# EAGLE board Proiect_TSC_v42 (EAGLE 9.7.0)
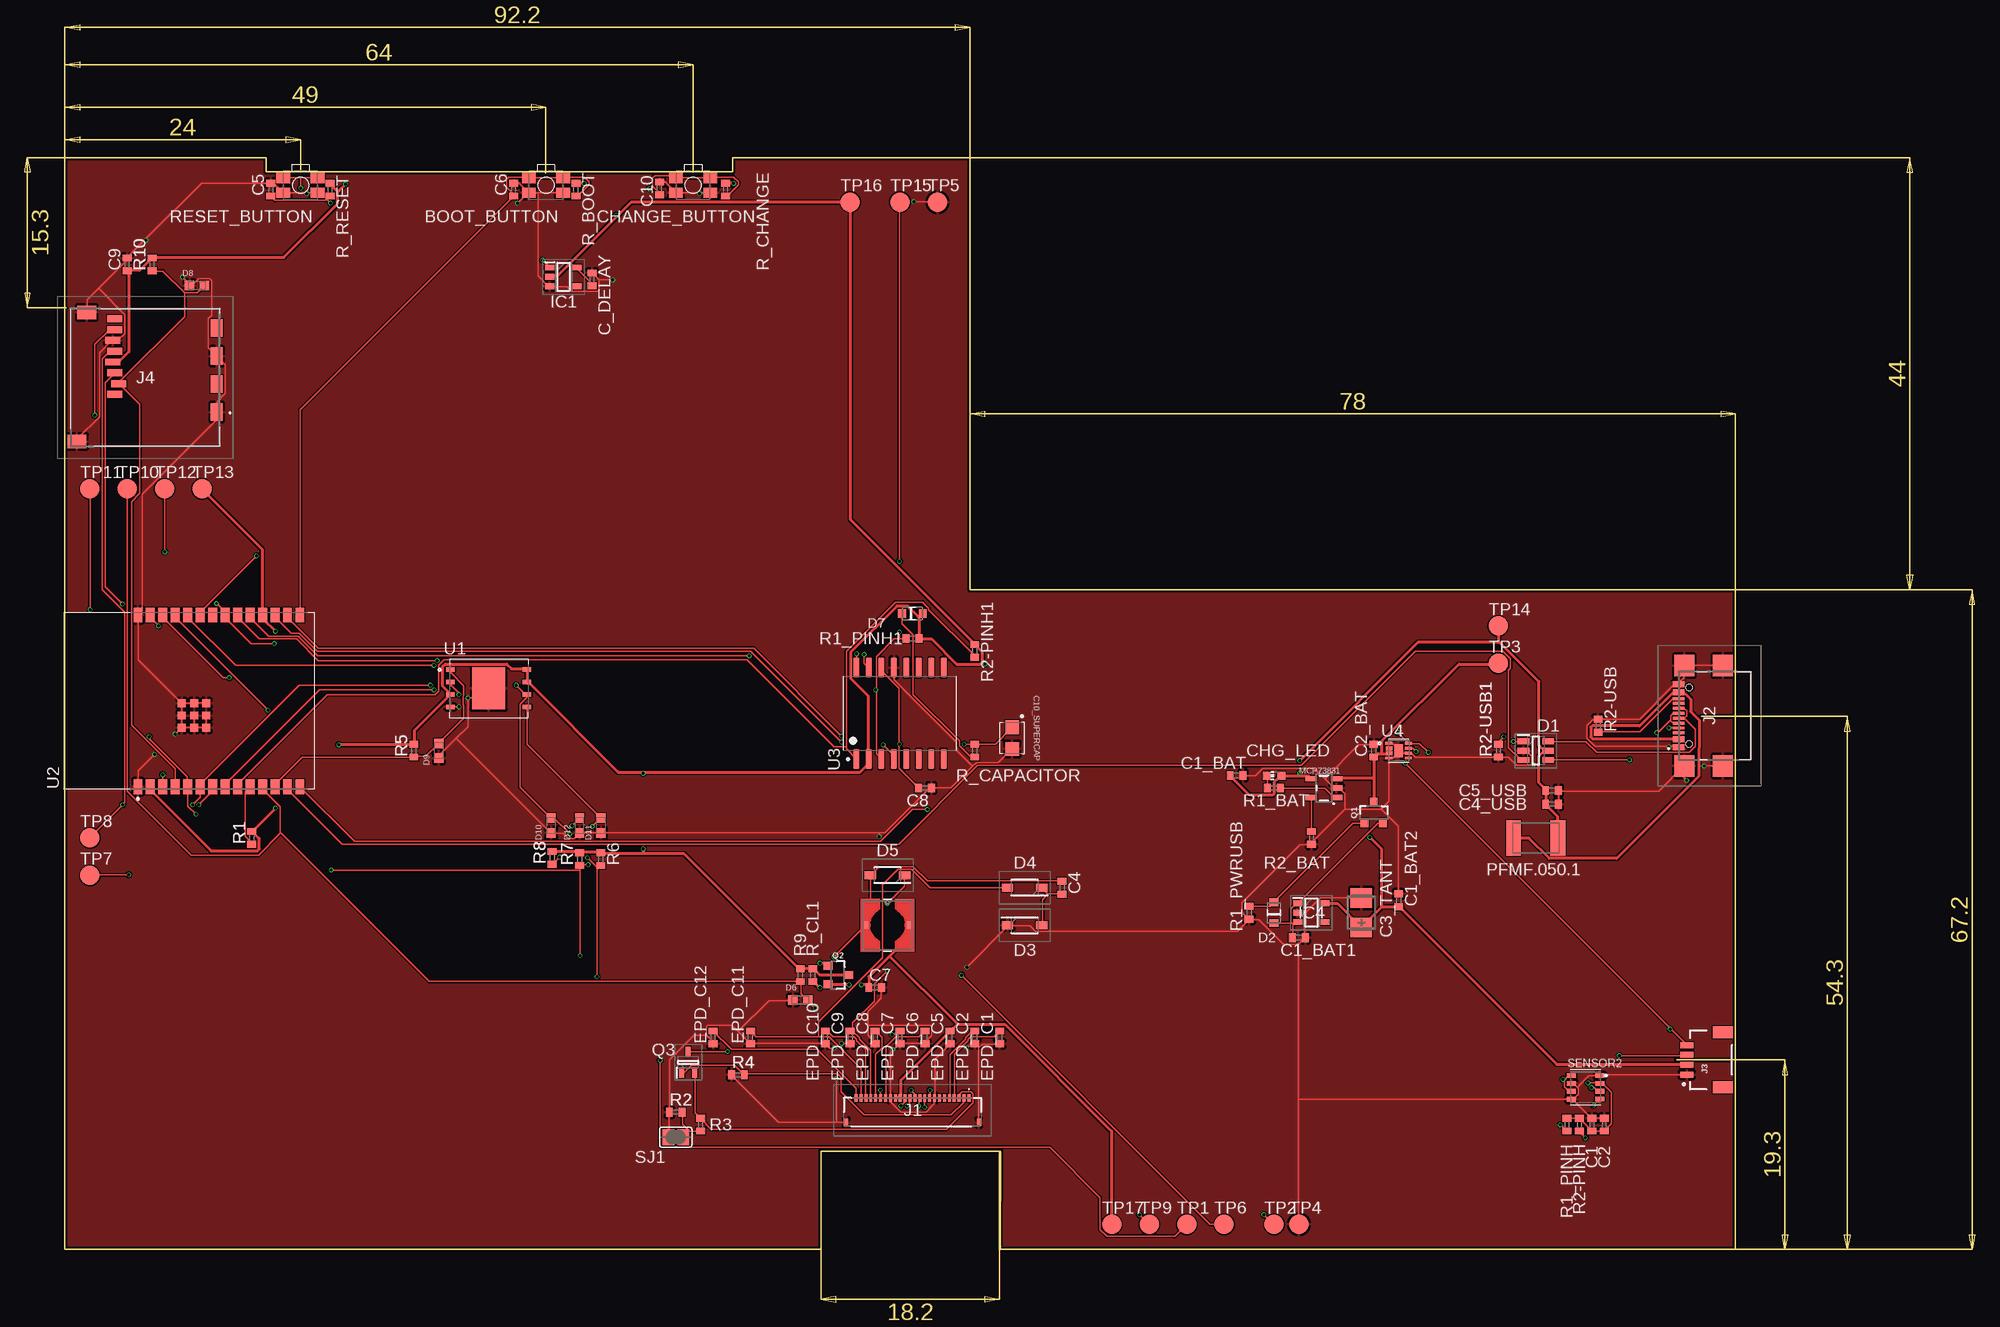
[diagram p0: board, top side]
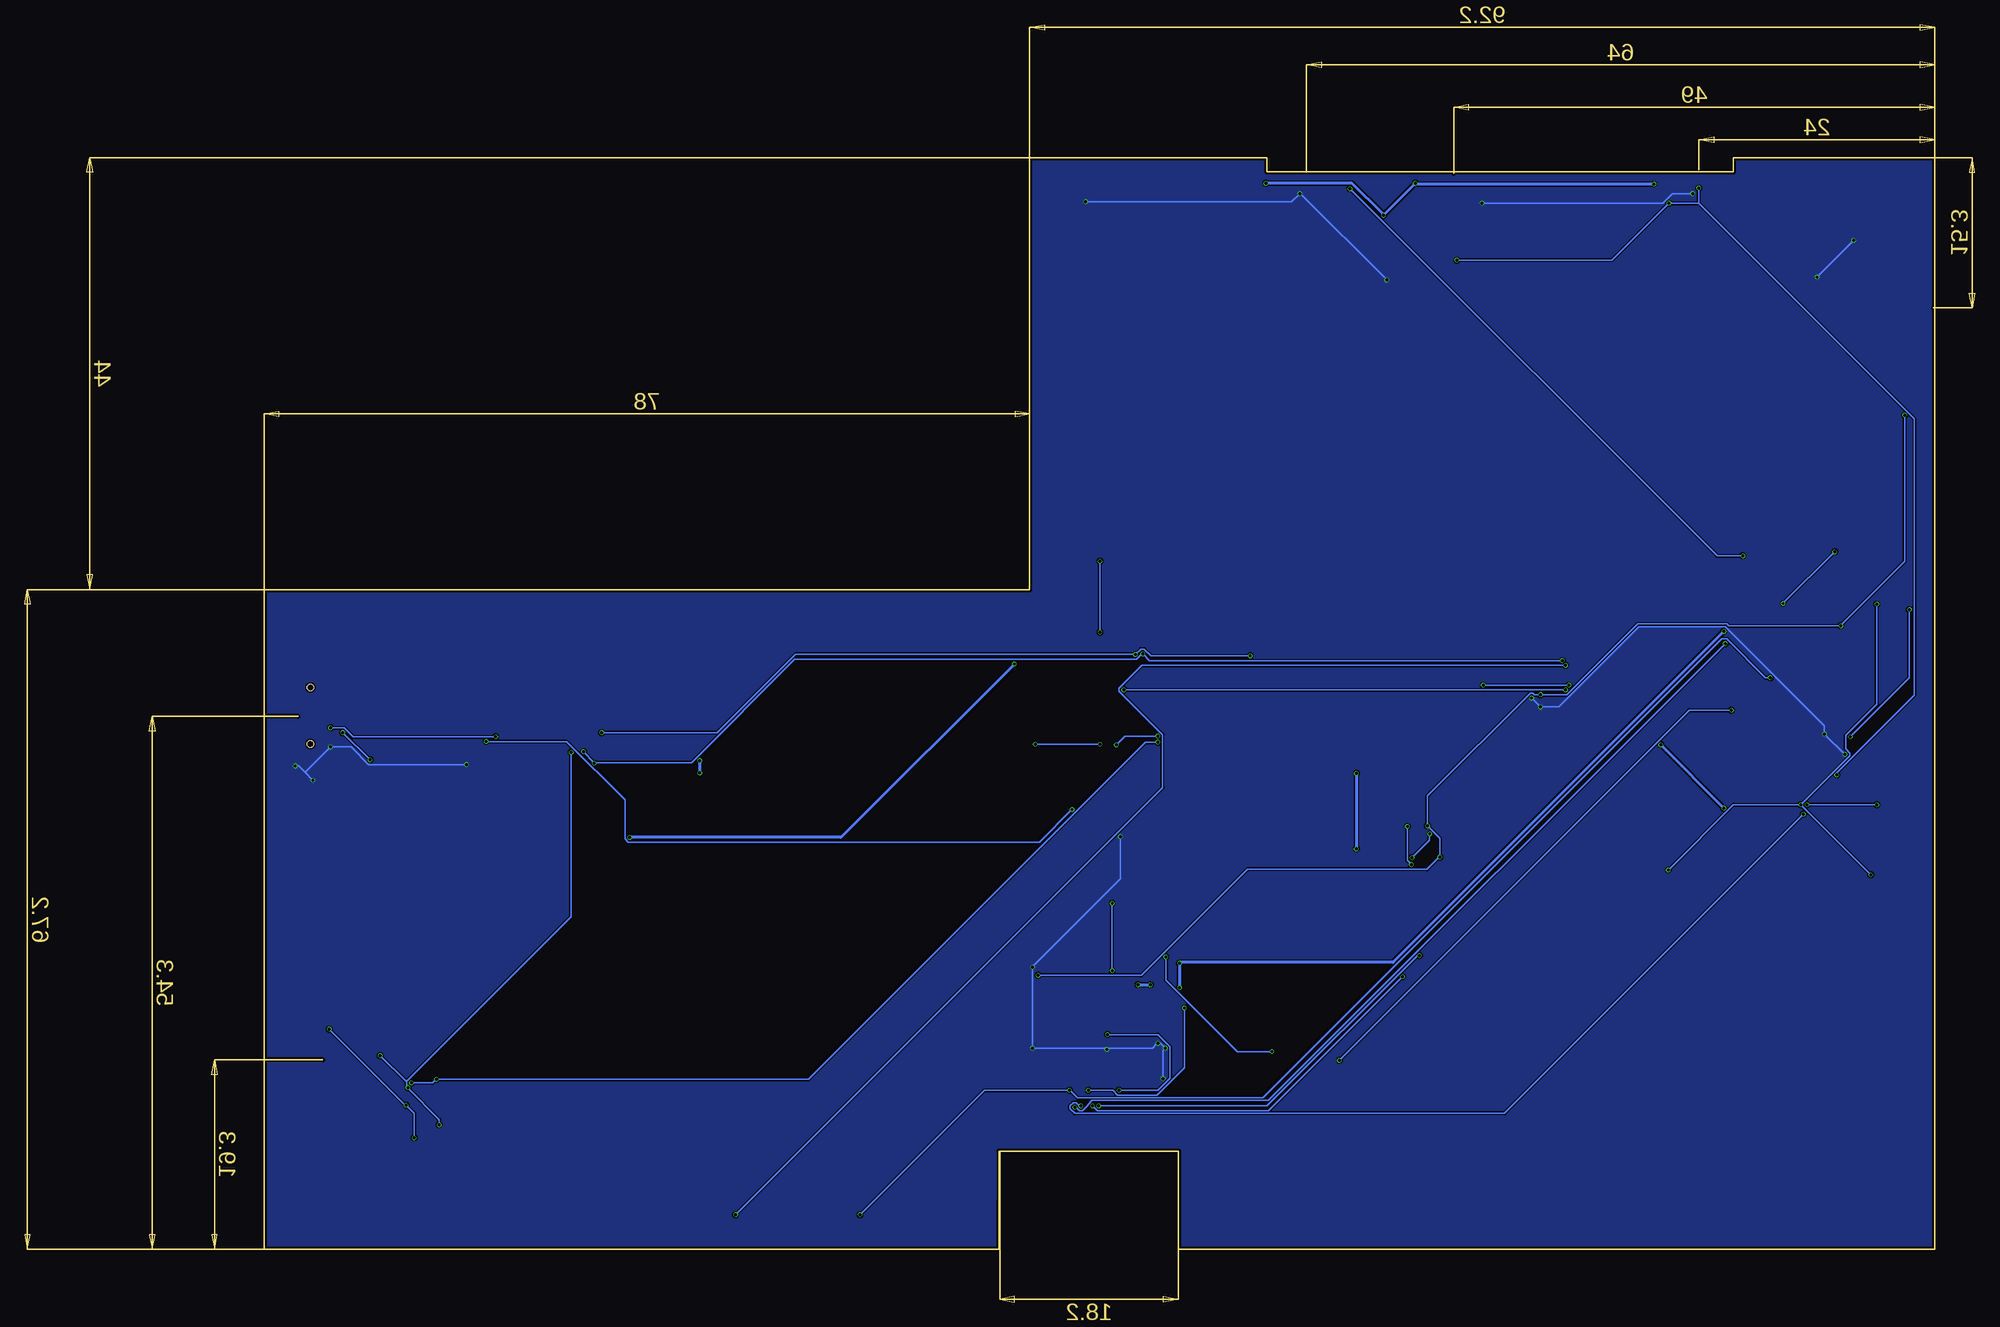
[diagram p1: board, bottom side, seen from below]

Size 170.2 x 111.2 mm. Coordinates in mm from the lower left corner, seen from the top.
Outline: 0,0 77.05,0 77.05,10 95.25,10 95.25,0 170.2,0 170.2,67.2 92.2,67.2 92.2,111.2 68.02,111.2 68.02,109.75 20.5,109.75 20.5,111.2 0,111.2 0,0
Copper layers (1*16): Top 0.035mm / dielectric 1.6mm / Bottom 0.035mm
Design rules "jlcpcb-2layers.dru": minimum track width 0.15mm, minimum drill 0.3mm, track to track 5mil, track to pad 5mil, pad to pad 5mil, via to via 5mil, smd to smd 5mil, copper to edge 0.2mm, drill to drill 6mil, minimum pad ring 10mil, minimum via ring 3mil, stop-mask expansion 4mil, vias tented up to drill 0mil, thermal gap 10mil
Net classes: 1 POWER: width 0.3 mm

## Footprints (pad centres in the part's own frame; a part is rotated, then mirrored left to right if it is on the bottom)
MYBUTTON = smd 1.4 x 1.05: 1 1.75,0.75; 2 -1.75,0.75; 3 -1.75,-0.75; 4 1.75,-0.75
EAGLE-LTSPICE_C0402 = smd 0.7 x 0.9: 1 -0.65,0; 2 0.65,0
ESP32_WROVER_EAGLE-LTSPICE_C0402 = smd 0.7 x 0.9: 1 -0.65,0; 2 0.65,0
RCL_CT3528 = smd 2 x 2.2: + -1.5,0; - 1.5,0
CAPCP3225X100N = smd 1.4 x 1.4: 1 -1.1,0; 2 1.1,0
ADAFRUIT_CHIP-LED0603 = smd 0.8 x 0.8: A 0,-0.75; C 0,0.75
SOT95P280X145-6N = smd 1.2 x 0.6: 1 -1.25,0.95; 2 -1.25,0; 3 -1.25,-0.95; 4 1.25,-0.95; 5 1.25,0; 6 1.25,0.95
ESP32_WROVER_AVX---SD0805S020S1R0_AVX_SD0805S020S1R0_0 = smd 0.8 x 0.9: 1 -1.05,0; 2 1.05,0
SOD3716X135N = smd 1.15 x 0.8: 1 -1.75,0; 2 1.75,0
DIOC1608X36N = smd 0.97 x 0.94: 1 -0.75,0; 2 0.75,0
SOT95P280X125-5N = smd 0.9 x 0.6: 1 -1.4,0.95; 2 -1.4,0; 3 -1.4,-0.95; 4 1.4,-0.95; 5 1.4,0.95
SOT95P280X120-5N = smd 0.9 x 0.6: 1 -1.4,0.95; 2 -1.4,0; 3 -1.4,-0.95; 4 1.4,-0.95; 5 1.4,0.95
FH34SRJ24S05SH99 = smd 0.3 x 0.8: 1 5.75,1.45; 2 5.25,1.45; 3 4.75,1.45; 4 4.25,1.45; 5 3.75,1.45; 6 3.25,1.45; 7 2.75,1.45; 8 2.25,1.45; 9 1.75,1.45; 10 1.25,1.45; 11 0.75,1.45; 12 0.25,1.45; 13 -0.25,1.45; 14 -0.75,1.45; 15 -1.25,1.45; 16 -1.75,1.45; 17 -2.25,1.45; 18 -2.75,1.45; 19 -3.25,1.45; 20 -3.75,1.45; 21 -4.25,1.45; 22 -4.75,1.45; 23 -5.25,1.45; 24 -5.75,1.45 | smd 0.4 x 0.8: MP1 6.75,-1.05; MP2 -6.75,-1.05
SAMACSYS_PARTS_USB4110GFA = smd 0.3 x 1.15: A1 -3.35,3.678; A4 -2.55,3.678; A5 -1.25,3.678; A6 -0.25,3.678; A7 0.25,3.678; A8 1.25,3.678; A9 2.55,3.678; A12 3.35,3.678; B1 3.05,3.678; B4 2.25,3.678; B5 1.75,3.678; B6 0.75,3.678; B7 -0.75,3.678; B8 -1.75,3.678; B9 -2.25,3.678; B12 -3.05,3.678 | smd 2.18 x 2: MP1 -5.11,-0.827; MP2 5.11,-0.827; MP3 -5.11,3.103; MP4 5.11,3.103 | hole 0.65: -2.89,2.603; 2.89,2.603
JST04_1MM_RA = smd 0.6 x 1.35: 1 -1.5,0; 2 -0.5,0; 3 0.5,0; 4 1.5,0 | smd 1.2 x 2: NC1 2.8,-3.675; NC2 -2.8,-3.675
112ATAARR03ATTEND = smd 1.8 x 1.2: G1 10.6,10.4; G2 4.9,10.4; S1 7.75,10.4; S2 2.05,10.4 | smd 1.4 x 1.9: G3 13.6,-3.85; G4 0.45,-2.85 | smd 0.7 x 1.5: P1 8.8,0; P2 7.7,0.4; P3 6.6,0; P4 5.5,-0.2; P5 4.4,0; P6 3.3,-0.2; P7 2.2,0; P8 1.1,0
IND_4828-WE-TPC_WRE = smd 0.635 x 0.762: 1 -2.286,0; 2 2.286,0
ESP32_WROVER_SPARKFUN-IC-POWER_SOT23-5 = smd 0.55 x 1.2: 1 -0.95,-1.3; 2 0,-1.3; 3 0.95,-1.3; 4 0.95,1.3; 5 -0.95,1.3
ESP32C6_VARISTOR_CT/CN1812 = smd 1.5 x 3.6: 1 -2.25,0; 2 2.25,0
ESP32_WROVER_SPARKFUN-DISCRETESEMI_SOT23-3 = smd 0.8 x 0.9: 1 -0.95,-1; 2 0.95,-1; 3 0,1.1
SOT65P210X110-3N = smd 1.05 x 0.5: 1 -1.05,0.65; 2 -1.05,-0.65; 3 1.05,0
ESP32_WROVER_EAGLE-LTSPICE_R0402 = smd 0.7 x 0.9: 1 -0.65,0; 2 0.65,0
ESP32_WROVER_BME680_PSON80P300X300X100-8N = smd 1.016 x 0.5: 1 1.458,1.2; 2 1.458,0.4; 3 1.458,-0.4; 4 1.458,-1.2; 5 -1.458,-1.22; 6 -1.458,-0.4; 7 -1.458,0.4; 8 -1.458,1.2
SJ = smd 1.168 x 1.6: 1 -0.762,0; 2 0.762,0
TP20R = smd 2 x 2: TP 0,0
SON127P600X800X80-9N = smd 0.94 x 0.44: 1 -3.895,1.905; 2 -3.895,0.635; 3 -3.895,-0.635; 4 -3.895,-1.905; 5 3.895,-1.905; 6 3.895,-0.635; 7 3.895,0.635; 8 3.895,1.905 | smd 3.4 x 4.3: 9 0,0
XCVR_ESP32-C6-WROOM-1-N8 = smd 1.5 x 0.9: 1 -8.75,5.26; 2 -8.75,3.99; 3 -8.75,2.72; 4 -8.75,1.45; 5 -8.75,0.18; 6 -8.75,-1.09; 7 -8.75,-2.36; 8 -8.75,-3.63; 9 -8.75,-4.9; 10 -8.75,-6.17; 11 -8.75,-7.44; 12 -8.75,-8.71; 13 -8.75,-9.98; 14 -8.75,-11.25; 15 8.75,-11.25; 16 8.75,-9.98; 17 8.75,-8.71; 18 8.75,-7.44; 19 8.75,-6.17; 20 8.75,-4.9; 21 8.75,-3.63; 22 8.75,-2.36; 23 8.75,-1.09; 24 8.75,0.18; 25 8.75,1.45; 26 8.75,2.72; 27 8.75,3.99; 28 8.75,5.26 | smd 0.8 x 0.8: 29_1 -2.755,0.79; 29_2 -1.505,0.79; 29_3 -0.255,0.79; 29_4 -2.755,-0.46; 29_5 -1.505,-0.46; 29_6 -0.255,-0.46; 29_7 -2.755,-1.71; 29_8 -1.505,-1.71; 29_9 -0.255,-1.71
SOIC127P1032X265-16N = smd 2.05 x 0.59: 1 -4.655,4.445; 2 -4.655,3.175; 3 -4.655,1.905; 4 -4.655,0.635; 5 -4.655,-0.635; 6 -4.655,-1.905; 7 -4.655,-3.175; 8 -4.655,-4.445; 9 4.655,-4.445; 10 4.655,-3.175; 11 4.655,-1.905; 12 4.655,-0.635; 13 4.655,0.635; 14 4.655,1.905; 15 4.655,3.175; 16 4.655,4.445
SON50P200X200X80-9N = smd 0.76 x 0.27: 1 -0.985,0.75; 4 -0.985,-0.75; 5 0.985,-0.75; 6 0.985,-0.25; 7 0.985,0.25; 8 0.985,0.75 | smd 0.76 x 0.422: 2 -0.985,0.25; 3 -0.985,-0.25 | smd 0.9 x 1.3: 9 0,0

## Placement (x,y rotation side)
BOOT_BUTTON  BUTTON_CUSYOMV1  [MYBUTTON]  49.02,108.38 180 top
C1  100nF  [EAGLE-LTSPICE_C0402]  155.57,12.7 90 top
C1_BAT  4.7uF  [EAGLE-LTSPICE_C0402]  119.38,48.26 0 top
C1_BAT1  4.7uF  [ESP32_WROVER_EAGLE-LTSPICE_C0402]  125.73,31.75 0 top
C1_BAT2  4.7uF  [ESP32_WROVER_EAGLE-LTSPICE_C0402]  135.89,35.56 90 top
C2  100nF  [EAGLE-LTSPICE_C0402]  156.84,12.7 90 top
C2_BAT  4.7uF  [EAGLE-LTSPICE_C0402]  133.35,50.8 90 top
C3_TANT  100uF  [RCL_CT3528]  132.08,34.29 90 top
C4  4.7uF/25V  [EAGLE-LTSPICE_C0402]  101.6,36.83 90 top
C4_USB  100 nF  [ESP32_WROVER_EAGLE-LTSPICE_C0402]  151.51,45.34 0 top
C5  1uF  [EAGLE-LTSPICE_C0402]  20.98,107.95 90 top
C5_USB  4.5uF  [ESP32_WROVER_EAGLE-LTSPICE_C0402]  151.51,46.74 0 top
C6  100nF  [EAGLE-LTSPICE_C0402]  45.72,107.95 90 top
C7  10uF  [EAGLE-LTSPICE_C0402]  82.55,26.67 0 top
C8  100nF  [EAGLE-LTSPICE_C0402]  87.63,46.99 0 top
C9  100nF  [EAGLE-LTSPICE_C0402]  6.35,100.33 90 top
C10  100nF  [EAGLE-LTSPICE_C0402]  60.58,108.08 90 top
C10_SUPERCAP  CPH3225A  [CAPCP3225X100N]  96.52,52.07 270 top
C_DELAY  100nF  [EAGLE-LTSPICE_C0402]  53.72,98.81 90 top
CHANGE_BUTTON  BUTTON_CUSYOMV1  [MYBUTTON]  64.01,108.38 180 top
CHG_LED  [ADAFRUIT_CHIP-LED0603]  123.19,48.26 90 top
D1  USBLC6-2SC6Y  [SOT95P280X145-6N]  149.86,50.8 0 top
D2  ESP32_WROVER_AVX---SD0805S020S1R0_AVX_SD0805S020S1R0_0_0AVX_SD0805S020S1R0_0_0  [ESP32_WROVER_AVX---SD0805S020S1R0_AVX_SD0805S020S1R0_0]  123.19,34.29 90 top
D3  MBR0530  [SOD3716X135N]  97.79,33.02 0 top
D4  MBR0530  [SOD3716X135N]  97.79,36.83 180 top
D5  MBR0530  [SOD3716X135N]  83.82,38.1 180 top
D6  PGB1010603MR  [DIOC1608X36N]  74.93,25.4 0 top
D7  ESP32_WROVER_AVX---SD0805S020S1R0_AVX_SD0805S020S1R0_0_0AVX_SD0805S020S1R0_0_0  [ESP32_WROVER_AVX---SD0805S020S1R0_AVX_SD0805S020S1R0_0]  86.36,64.77 0 top
D8  PGB1010603MR  [DIOC1608X36N]  13.46,98.17 0 top
D9  PGB1010603MR  [DIOC1608X36N]  38.1,50.8 90 top
D10  PGB1010603MR  [DIOC1608X36N]  49.53,43.18 90 top
D11  PGB1010603MR  [DIOC1608X36N]  54.61,43.18 90 top
D12  PGB1010603MR  [DIOC1608X36N]  52.45,43.18 90 top
EPD_C1  1uF/50V  [EAGLE-LTSPICE_C0402]  95.25,21.59 90 top
EPD_C2  1uF/50V  [EAGLE-LTSPICE_C0402]  92.71,21.59 90 top
EPD_C5  0.1uF/50V  [EAGLE-LTSPICE_C0402]  90.17,21.59 90 top
EPD_C6  1uF/50V  [EAGLE-LTSPICE_C0402]  87.63,21.59 90 top
EPD_C7  1uF/50V  [EAGLE-LTSPICE_C0402]  85.09,21.59 90 top
EPD_C8  1uF/50V  [EAGLE-LTSPICE_C0402]  82.55,21.59 90 top
EPD_C9  1uF/50V  [EAGLE-LTSPICE_C0402]  80.01,21.59 90 top
EPD_C10  1uF/50V  [EAGLE-LTSPICE_C0402]  77.47,21.59 90 top
EPD_C11  1uF/50V  [EAGLE-LTSPICE_C0402]  69.85,21.59 90 top
EPD_C12  1uF/50V  [EAGLE-LTSPICE_C0402]  66.04,21.59 90 top
IC1  BD5229G-TR  [SOT95P280X125-5N]  50.8,99.06 0 top
IC4  XC6220A331MR-G  [SOT95P280X120-5N]  127,34.29 0 top
J1  FH34SRJ-24S-0.5SH_99_  [FH34SRJ24S05SH99]  86.36,13.97 0 top
J2  SAMACSYS_PARTS_USB4110-GF-A  [SAMACSYS_PARTS_USB4110GFA]  168.1,54.36 90 top
J3  QWIIC_RIGHT_ANGLE  [JST04_1MM_RA]  165.25,19.3 90 top
J4  112A-TAAR-R03_ATTEND  [112ATAARR03ATTEND]  5.08,95.89 270 top
L1  68uH  [IND_4828-WE-TPC_WRE]  83.82,33.02 0 top
MCP73831  ESP32_WROVER_SPARKFUN-IC-POWER_MCP73831  [ESP32_WROVER_SPARKFUN-IC-POWER_SOT23-5]  128.27,46.99 90 top
PFMF.050.1  ESP32C6_VARISTORCN1812  [ESP32C6_VARISTOR_CT/CN1812]  149.86,41.91 0 top
Q1  20V/4.2A/52mΩ/1.4W  [ESP32_WROVER_SPARKFUN-DISCRETESEMI_SOT23-3]  133.35,44.45 0 top
Q2  20V/4.2A/52mΩ/1.4W  [ESP32_WROVER_SPARKFUN-DISCRETESEMI_SOT23-3]  78.74,27.94 270 top
Q3  SI1308EDL-T1-GE3  [SOT65P210X110-3N]  63.5,19.05 90 top
R1  10k  [ESP32_WROVER_EAGLE-LTSPICE_R0402]  19.05,41.91 90 top
R1_BAT  200  [ESP32_WROVER_EAGLE-LTSPICE_R0402]  123.19,46.99 0 top
R1_PINH  10K  [ESP32_WROVER_EAGLE-LTSPICE_R0402]  153.03,12.7 90 top
R1_PINH1  10K  [ESP32_WROVER_EAGLE-LTSPICE_R0402]  86.36,62.23 0 top
R1_PWRUSB  100k  [ESP32_WROVER_EAGLE-LTSPICE_R0402]  120.65,34.29 90 top
R2  2.2  [ESP32_WROVER_EAGLE-LTSPICE_R0402]  62.23,13.97 0 top
R2-PINH  10K  [ESP32_WROVER_EAGLE-LTSPICE_R0402]  154.31,12.7 90 top
R2-PINH1  10K  [ESP32_WROVER_EAGLE-LTSPICE_R0402]  92.71,60.96 90 top
R2-USB  5k1  [ESP32_WROVER_EAGLE-LTSPICE_R0402]  156.21,53.34 90 top
R2-USB1  5k1  [ESP32_WROVER_EAGLE-LTSPICE_R0402]  146.05,50.8 90 top
R2_BAT  2k  [ESP32_WROVER_EAGLE-LTSPICE_R0402]  127,41.91 90 top
R3  0.47  [ESP32_WROVER_EAGLE-LTSPICE_R0402]  64.77,12.7 90 top
R4  10k  [ESP32_WROVER_EAGLE-LTSPICE_R0402]  68.58,17.78 0 top
R5  10K  [ESP32_WROVER_EAGLE-LTSPICE_R0402]  35.56,50.8 90 top
R6  10K  [ESP32_WROVER_EAGLE-LTSPICE_R0402]  54.61,39.75 90 top
R7  10K  [ESP32_WROVER_EAGLE-LTSPICE_R0402]  52.45,39.75 90 top
R8  10K  [ESP32_WROVER_EAGLE-LTSPICE_R0402]  49.66,39.88 90 top
R9  10K  [ESP32_WROVER_EAGLE-LTSPICE_R0402]  74.93,27.94 90 top
R10  10K  [ESP32_WROVER_EAGLE-LTSPICE_R0402]  8.89,100.33 90 top
R_BOOT  10k  [ESP32_WROVER_EAGLE-LTSPICE_R0402]  52.07,107.95 90 top
R_CAPACITOR  15  [ESP32_WROVER_EAGLE-LTSPICE_R0402]  92.71,50.8 90 top
R_CHANGE  10k  [ESP32_WROVER_EAGLE-LTSPICE_R0402]  67.31,107.95 90 top
R_CL1  10k  [ESP32_WROVER_EAGLE-LTSPICE_R0402]  76.2,27.94 90 top
R_RESET  10k  [ESP32_WROVER_EAGLE-LTSPICE_R0402]  27.03,107.95 90 top
RESET_BUTTON  BUTTON_CUSYOMV1  [MYBUTTON]  24,108.38 180 top
SENSOR2  ESP32_WROVER_BME680_BME680  [ESP32_WROVER_BME680_PSON80P300X300X100-8N]  154.94,16.51 0 top
SJ1  [SJ]  62.23,11.43 0 top
TP1  TPTP20R  [TP20R]  114.3,2.54 0 top
TP2  TPTP20R  [TP20R]  123.19,2.54 0 top
TP3  TPTP20R  [TP20R]  146.05,59.69 0 top
TP4  TPTP20R  [TP20R]  125.73,2.54 0 top
TP5  TPTP20R  [TP20R]  88.9,106.68 0 top
TP6  TPTP20R  [TP20R]  118.11,2.54 0 top
TP7  TPTP20R  [TP20R]  2.54,38.1 0 top
TP8  TPTP20R  [TP20R]  2.54,41.91 0 top
TP9  TPTP20R  [TP20R]  110.49,2.54 0 top
TP10  TPTP20R  [TP20R]  6.35,77.47 0 top
TP11  TPTP20R  [TP20R]  2.55,77.47 0 top
TP12  TPTP20R  [TP20R]  10.16,77.47 0 top
TP13  TPTP20R  [TP20R]  13.97,77.47 0 top
TP14  TPTP20R  [TP20R]  146.05,63.5 0 top
TP15  TPTP20R  [TP20R]  85.09,106.68 0 top
TP16  TPTP20R  [TP20R]  80.01,106.68 0 top
TP17  TPTP20R  [TP20R]  106.68,2.54 0 top
U1  W25Q512JVEIQ  [SON127P600X800X80-9N]  43.18,57.15 0 top
U2  ESP32-C6-WROOM-1-N8  [XCVR_ESP32-C6-WROOM-1-N8]  12.7,55.88 90 top
U3  DS3231SN#  [SOIC127P1032X265-16N]  85.09,54.61 90 top
U4  MAX17048G+T10  [SON50P200X200X80-9N]  135.89,50.8 0 top

## Library data of the parts
BOOT_BUTTON C1 C1_BAT C2 C2_BAT C4-C10 C_DELAY CHANGE_BUTTON CHG_LED EPD_C1 EPD_C2 EPD_C5-EPD_C12 PFMF.050.1 R1 R1_BAT R1_PINH R1_PINH1 R1_PWRUSB R2 R2-PINH R2-PINH1 R2-USB R2-USB1 R2_BAT R3-R10 R_BOOT R_CAPACITOR R_CHANGE R_CL1 R_RESET RESET_BUTTON SJ1 TP1-TP17 = DeskAssistant v19 v1
C1_BAT1 C1_BAT2 C4_USB C5_USB = DeskAssistant v19 v1; SPICEMODEL: NONE; SPICEPREFIX: C
C3_TANT = DeskAssistant v19 v1; SPICEPREFIX: C
C10_SUPERCAP = DeskAssistant v19 v1; AVAILABILITY: Not in stock; CHECK_PRICES: https://www.snapeda.com/parts/CPH3225A/Seiko+Instruments/view-part/?ref=eda; DESCRIPTION: 11 mF (EDLC) Supercapacitor 3.3 V 1210 (3225 Metric) - -; MF: Seiko Instruments; MP: CPH3225A; PACKAGE: 1210 Seiko; PRICE: None; PURCHASE-URL: https://www.snapeda.com/api/url_track_click_mouser/?unipart_id=562593&manufacturer=Seiko Instruments&part_name=CPH3225A&search_term=None; SNAPEDA_LINK: https://www.snapeda.com/parts/CPH3225A/Seiko+Instruments/view-part/?ref=snap
D1 = DeskAssistant v19 v1; AVAILABILITY: In Stock; CHECK_PRICES: https://www.snapeda.com/parts/USBLC6-2SC6Y/STMicroelectronics/view-part/?ref=eda; DESCRIPTION: 17V Clamp 5A (8/20µs) Ipp Tvs Diode Surface Mount SOT-23-6; MF: STMicroelectronics; MP: USBLC6-2SC6Y; PACKAGE: SOT-23-6 STMicroelectronics; PRICE: None; SNAPEDA_LINK: https://www.snapeda.com/parts/USBLC6-2SC6Y/STMicroelectronics/view-part/?ref=snap
D2 D7 = DeskAssistant v19 v1; CENTROID_NOT_SPECIFIED: No; DATASHEET: http://datasheets.avx.com/schottky.pdf; DIGIKEY_DESCRIPTION: DIODE SCHOTTKY 20V 1A 0805; DIGIKEY_PART_NUMBER: 478-7800-1-ND; LEAD_FREE: yes; MF: AVX; MOUSER_PART_NUMBER: 581-SD0805S020S1R0; PACKAGE: 0805 (2012 metric); PREFIX: D; ROHS: yes; TEMPERATURE_RANGE_HIGH: +125°C; TEMPERATURE_RANGE_LOW: -55°C
D3-D5 = DeskAssistant v19 v1; AVAILABILITY: In Stock; CHECK_PRICES: https://www.snapeda.com/parts/MBR0530/Onsemi/view-part/?ref=eda; DESCRIPTION: Diode Schottky 30 V 500mA Surface Mount SOD-123; MF: ON Semiconductor; MP: MBR0530; PACKAGE: SOD-123-2 ON Semiconductor; PRICE: None; PURCHASE-URL: https://www.snapeda.com/api/url_track_click_mouser/?unipart_id=179458&manufacturer=ON Semiconductor&part_name=MBR0530&search_term=None; SNAPEDA_LINK: https://www.snapeda.com/parts/MBR0530/Onsemi/view-part/?ref=snap
D6 D8-D12 = DeskAssistant v19 v1; AVAILABILITY: In Stock; CHECK_PRICES: https://www.snapeda.com/parts/PGB1010603MR/Littelfuse/view-part/?ref=eda; DESCRIPTION: 150V (Typ) Clamp - Ipp Tvs Diode Surface Mount 0603 (1608 Metric); MF: Littelfuse Inc.; MP: PGB1010603MR; PACKAGE: 0603 Littelfuse Inc.; PRICE: None; PURCHASE-URL: https://www.snapeda.com/api/url_track_click_mouser/?unipart_id=5659453&manufacturer=Littelfuse Inc.&part_name=PGB1010603MR&search_term=None; SNAPEDA_LINK: https://www.snapeda.com/parts/PGB1010603MR/Littelfuse/view-part/?ref=snap
IC1 = DeskAssistant v19 v1; DESCRIPTION: Voltage Detector with Adjustable Delay Time: CMOS processes are utilized to develop high precision, low current consumption CMOS reset ICs that allow arbitrary setting of the delay time. The extensive lineup includes both Nch Open Drain and CMOS output types in a wide range of detection voltages (from 2.3V to 6.0V, in 0.1V steps), enabling selection of the ideal solution based on customer requirements. In addition, the entire series is of course both lead-free and RoHS-compliant.; HEIGHT: 1.25mm; MANUFACTURER_NAME: ROHM Semiconductor; MANUFACTURER_PART_NUMBER: BD5229G-TR; MOUSER_PART_NUMBER: 755-BD5229G-TR; MOUSER_PRICE-STOCK: https://www.mouser.co.uk/ProductDetail/ROHM-Semiconductor/BD5229G-TR?qs=4kLU8WoGk0vvnhrrYwdszw%3D%3D
IC4 = DeskAssistant v19 v1; DESCRIPTION: LDO Voltage Regulators; HEIGHT: 1.2mm; MANUFACTURER_NAME: Torex; MANUFACTURER_PART_NUMBER: XC6220A331MR-G; MOUSER_PART_NUMBER: 865-XC6220A331MR-G; MOUSER_PRICE-STOCK: https://www.mouser.co.uk/ProductDetail/Torex-Semiconductor/XC6220A331MR-G?qs=AsjdqWjXhJ8ZSWznL1J0gg%3D%3D
J1 = DeskAssistant v19 v1; DESCRIPTION: 24 Position FFC, FPC Connector Contacts, Top and Bottom 0.020" (0.50mm) Surface Mount, Right Angle; HEIGHT: 1.1mm; MANUFACTURER_NAME: Hirose; MANUFACTURER_PART_NUMBER: FH34SRJ-24S-0.5SH(99); MOUSER_PART_NUMBER: 798-FH34SRJ24S05SH99; MOUSER_PRICE-STOCK: https://www.mouser.co.uk/ProductDetail/Hirose-Connector/FH34SRJ-24S-0.5SH99?qs=vcbW%252B4%252BSTIpKBl5ap9J8Fw%3D%3D
J2 = DeskAssistant v19 v1; DESCRIPTION: CONN USB 2.0 TYPE-C R/A SMT; HEIGHT: 3.26mm; MANUFACTURER_NAME: GCT (GLOBAL CONNECTOR TECHNOLOGY); MANUFACTURER_PART_NUMBER: USB4110-GF-A; MOUSER_PART_NUMBER: 640-USB4110-GF-A; MOUSER_PRICE-STOCK: https://www.mouser.co.uk/ProductDetail/GCT/USB4110-GF-A?qs=KUoIvG%2F9IlYiZvIXQjyJeA%3D%3D
J3 = DeskAssistant v19 v1; PROD_ID: CONN-13694
J4 = DeskAssistant v19 v1; DESCRIPTION: Micro SD Card Socket, Push-Push Type, Top Mount, SMT, H=1.83mm, 10u; HEIGHT: 1.9mm; MANUFACTURER_NAME: ATTEND; MANUFACTURER_PART_NUMBER: 112A-TAAR-R03 ATTEND
L1 = DeskAssistant v19 v1; COPYRIGHT: Copyright (C) 2024 Ultra Librarian. All rights reserved.; MANUFACTURER_PART_NUMBER: 744043680; MFR_NAME: Wurth Electronics
MCP73831 = DeskAssistant v19 v1; PROD_ID: IC-09995
Q1 Q2 = DeskAssistant v19 v1; PROD_ID: TRAN-14388
Q3 = DeskAssistant v19 v1; AVAILABILITY: In Stock; CHECK_PRICES: https://www.snapeda.com/parts/SI1308EDL-T1-GE3/Vishay+Siliconix/view-part/?ref=eda; DESCRIPTION: Si1308EDL-T1-GE3 N-channel MOSFET Transistor, 1.5 A, 30 V, 3-Pin SC-70 | Siliconix / Vishay SI1308EDL-T1-GE3; MF: Vishay Siliconix; MP: SI1308EDL-T1-GE3; PACKAGE: SOT-323 Vishay Semiconductor; PRICE: None; PURCHASE-URL: https://www.snapeda.com/api/url_track_click_mouser/?unipart_id=274603&manufacturer=Vishay Siliconix&part_name=SI1308EDL-T1-GE3&search_term=None; SNAPEDA_LINK: https://www.snapeda.com/parts/SI1308EDL-T1-GE3/Vishay+Siliconix/view-part/?ref=snap
SENSOR2 = DeskAssistant v19 v1; AVAILABILITY: Unavailable; DESCRIPTION: Integrated Environmental Unit; MF: Bosch Sensortec; MP: BME680; PACKAGE: LGA-8 Bosch Tools; PRICE: None
U1 = DeskAssistant v19 v1; AVAILABILITY: In Stock; CHECK_PRICES: https://www.snapeda.com/parts/W25Q512JVEIQ/Winbond+Electronics/view-part/?ref=eda; DESCRIPTION: FLASH - NOR Memory IC 512Mb (64M x 8) SPI - Quad I/O 133 MHz 8-WSON (8x6); MF: Winbond Electronics; MP: W25Q512JVEIQ; PACKAGE: Package; PRICE: None; SNAPEDA_LINK: https://www.snapeda.com/parts/W25Q512JVEIQ/Winbond+Electronics/view-part/?ref=snap
U2 = DeskAssistant v19 v1; AVAILABILITY: In Stock; CHECK_PRICES: https://www.snapeda.com/parts/ESP32-C6-WROOM-1-N8/Espressif+Systems/view-part/?ref=eda; DESCRIPTION: Multiprotocol Modules ESP32-C6 module, Wi-Fi 6 in 2.4 GHz band, Bluetooth 5, Zigbee 3.0 and Thread. ESP34-WROOM Compatible - ENGINEERING SAMPLE; MF: Espressif Systems; MP: ESP32-C6-WROOM-1-N8; PACKAGE: None; PRICE: None; SNAPEDA_LINK: https://www.snapeda.com/parts/ESP32-C6-WROOM-1-N8/Espressif+Systems/view-part/?ref=snap
U3 = DeskAssistant v19 v1; AVAILABILITY: In Stock; CHECK_PRICES: https://www.snapeda.com/parts/DS3231SN%23/Analog+Devices/view-part/?ref=eda; DESCRIPTION: Extremely Accurate I²C-Integrated RTC/TCXO/Crystal; MF: Analog Devices; MP: DS3231SN#; PACKAGE: SOIC-16 Maxim; PRICE: None; PURCHASE-URL: https://www.snapeda.com/api/url_track_click_mouser/?unipart_id=99048&manufacturer=Analog Devices&part_name=DS3231SN#&search_term=None; SNAPEDA_LINK: https://www.snapeda.com/parts/DS3231SN%23/Analog+Devices/view-part/?ref=snap
U4 = DeskAssistant v19 v1; AVAILABILITY: In Stock; CHECK_PRICES: https://www.snapeda.com/parts/MAX17048G+T10/Analog+Devices/view-part/?ref=eda; DESCRIPTION: 3µA 1-Cell/2-Cell Fuel Gauge with ModelGauge; MF: Analog Devices; MP: MAX17048G+T10; PACKAGE: TDFN-8 Maxim; PRICE: None; PURCHASE-URL: https://www.snapeda.com/api/url_track_click_mouser/?unipart_id=329239&manufacturer=Analog Devices&part_name=MAX17048G+T10&search_term=None; SNAPEDA_LINK: https://www.snapeda.com/parts/MAX17048G+T10/Analog+Devices/view-part/?ref=snap

## Nets
3V3 [POWER]: C1_BAT2.1 C3_TANT.+ C9.1 D7.2 IC1.2 IC4.5 J3.2 J4.P4 Q2.3 R1.2 R1_PINH1.2 R2-PINH1.2 R5.2 R6.2 R7.2 R8.2 R9.2 R10.2 R_BOOT.2 R_CHANGE.2 R_CL1.2 R_RESET.2 TP16.TP U1.3 U1.7 U1.8 U2.2 U3.2
32KHZ: R2-PINH1.1 U2.9 U3.1
DN: D1.4 J2.A7 J2.B7
DP: D1.6 J2.A6 J2.B6
EPD_3V3 [POWER]: C7.1 EPD_C5.2 J1.15 J1.16 L1.2 Q2.2 TP17.TP
EPD_3V3_C [POWER]: Q2.1 R_CL1.1 TP13.TP U2.18
EPD_BUSY: J1.9 TP9.TP U2.26
EPD_CS: D6.2 J1.12 R9.1 TP10.TP U2.11
EPD_DC: J1.11 TP11.TP U2.5
EPD_RST: J1.10 TP12.TP U2.21
FLASH_CS: D9.2 R5.1 U1.1 U2.12
GDR: J1.2 Q3.1 R4.2
GND: BOOT_BUTTON.1 BOOT_BUTTON.2 C1.2 C1_BAT1.2 C1_BAT2.2 C1_BAT.2 C2.2 C2_BAT.2 C3_TANT.- C4_USB.2 C5.2 C5_USB.2 C6.2 C7.2 C8.2 C9.2 C10.2 C10_SUPERCAP.2 C_DELAY.2 CHANGE_BUTTON.1 CHANGE_BUTTON.2 D1.2 D3.1 D6.1 D8.1 D9.1 D10.1 D11.1 D12.1 EPD_C1.1 EPD_C2.1 EPD_C5.1 EPD_C6.1 EPD_C7.1 EPD_C8.1 EPD_C9.1 EPD_C10.1 EPD_C11.1 EPD_C12.1 IC1.3 IC4.2 J1.8 J1.17 J1.MP1 J1.MP2 J2.A1 J2.A12 J2.B1 J2.B12 J2.MP1 J2.MP2 J2.MP3 J2.MP4 J3.1 J4.G1 J4.G2 J4.G3 J4.G4 J4.P6 MCP73831.2 R1_PWRUSB.1 R2-USB1.1 R2-USB.2 R2.1 R2_BAT.1 R4.1 RESET_BUTTON.1 RESET_BUTTON.2 SENSOR2.1 SENSOR2.5 SENSOR2.7 SJ1.1 TP4.TP TP5.TP U1.4 U1.9 U2.1 U2.28 U2.29_1 U2.29_2 U2.29_3 U2.29_4 U2.29_5 U2.29_6 U2.29_7 U2.29_8 U2.29_9 U3.13 U4.1 U4.4 U4.6 U4.9
GPIO8: R1.1 U2.10
I2C_PW: C1.1 C2.1 R1_PINH.2 R2-PINH.2 SENSOR2.2 SENSOR2.6 SENSOR2.8 U2.17
INT_RTC: R1_PINH1.1 TP15.TP U2.8 U3.3
IO/BOOT: BOOT_BUTTON.3 BOOT_BUTTON.4 C6.1 R_BOOT.1 U2.15
IO/CHANGE: C10.1 CHANGE_BUTTON.3 CHANGE_BUTTON.4 R_CHANGE.1 U2.23
MISO: D12.2 J4.P7 R8.1 TP6.TP U1.2 U2.27
MOSI: D11.2 J1.14 J4.P3 R7.1 TP7.TP U1.5 U2.7
N$1: J2.B5 R2-USB.1
N$2: C1_BAT1.1 D2.1 IC4.1 IC4.3 Q1.2
N$3: J2.A5 R2-USB1.2
N$4: C4.1 D3.2 D4.1
N$5: CHG_LED.C R1_BAT.1
N$6: MCP73831.1 R1_BAT.2
N$7: MCP73831.5 R2_BAT.2
N$8: EPD_C12.2 J1.24
N$9: C_DELAY.1 IC1.5
N$10: D7.1 R_CAPACITOR.1
N$11: EPD_C8.2 J1.20
N$12: D2.2 Q1.1 R1_PWRUSB.2
N$14: EPD_C10.2 J1.22
N$15: EPD_C7.2 J1.19
N$16: EPD_C6.2 J1.18
N$24: EPD_C1.2 J1.4
N$26: EPD_C2.2 J1.5
PREVGH: D5.1 EPD_C9.2 J1.21
PREVGL: D4.2 EPD_C11.2 J1.23
RESE: J1.3 Q3.2 R3.2
RESE': R2.2 R3.1 SJ1.2
RESET: C5.1 IC1.1 R_RESET.1 RESET_BUTTON.3 RESET_BUTTON.4 U2.3
RTC_RST: U2.16 U3.4
RX: TP2.TP U2.24
SCK: D10.2 J1.13 J4.P5 R6.1 TP8.TP U1.6 U2.6
SCL: J3.4 R2-PINH.1 SENSOR2.4 U2.20 U3.16 U4.7
SDA: J3.3 R1_PINH.1 SENSOR2.3 U2.19 U3.15 U4.8
SRC: C4.2 D5.2 L1.1 Q3.3
SS_SD: D8.2 J4.P2 R10.1 U2.4
TX: TP1.TP U2.25
USB_D+: D1.1 U2.14
USB_D-: D1.3 U2.13
VBAT [POWER]: C2_BAT.1 MCP73831.3 Q1.3 TP3.TP U4.2 U4.3
VBUS [POWER]: C1_BAT.1 C4_USB.1 C5_USB.1 CHG_LED.A D1.5 MCP73831.4 PFMF.050.1.2 TP14.TP
VRTC: C8.1 C10_SUPERCAP.1 R_CAPACITOR.2 U3.14
VUSB [POWER]: J2.A4 J2.A9 J2.B4 J2.B9 PFMF.050.1.1

## Tracks (layer width: path | path; a pad name or v marks a point on that pad's centre or on a via)
3V3  (via drill 0.3)
  Top 0.3: 56.27,105.22 57.69,106.64 79.98,106.64 TP16.TP 80.05,106.51 80.05,74.31 92.66,61.7 R2-PINH1.2 92.73,61.56 93.49,60.8 93.49,59.83 | 56.27,105.22 50.14,99.1 49.44,99.1 IC1.2 | v52.91,108.58 52.08,108.58 R_BOOT.2 | v56.16,105.33 56.27,105.22 | v68.14,108.58 67.31,108.58 R_CHANGE.2 | 27.77,107.75 27.08,108.44 27.08,108.58 R_RESET.2 | 27.77,107.75 27.77,106.51 22.3,101.04 9,101.04 R10.2 8.86,100.97 7.62,99.72 6.37,99.72 C9.1 6.51,99.58 6.51,91.41 5.54,90.44 4.92,90.44 J4.P4 | v28.6,108.52 27.91,107.82 27.77,107.75 | IC4.5 128.46,35.18 129.71,35.18 132.06,32.83 C3_TANT.+ 132.2,32.89 134.21,34.9 | 134.21,34.9 135.87,34.9 C1_BAT2.1 136.01,34.83 152,18.84 165.23,18.84 J3.2 | R8.2 49.72,40.51 52.35,40.51 R7.2 52.49,40.44 54.57,40.44 R6.2 54.71,40.3 58.93,40.3 | Q2.3 79.78,27.98 76.87,27.98 76.31,28.53 R_CL1.2 76.17,28.6 75,28.6 R9.2 74.79,28.6 63.09,40.3 58.93,40.3 | 87.05,64.4 87.05,62.26 R1_PINH1.2 87.19,62.19 88.29,62.19 90.86,59.62 93.28,59.62 93.49,59.83 | 87.05,64.4 87.39,64.75 D7.2 | 87.05,64.4 86.91,64.47 85.87,65.51 84.76,65.51 80.05,60.8 80.05,58.17 81.85,56.37 81.85,50 U3.2 81.78,49.86 81.78,49.38 81.02,48.61 58.93,48.61 | U2.2 8.73,47.09 8.73,46.74 14.89,40.58 19.6,40.58 19.8,40.79 19.8,41.83 19.11,42.52 R1.2 19.18,42.66 v21.47,44.94 | v27.91,51.38 35.46,51.38 R5.2 35.59,51.45 35.59,52.84 39.27,56.51 U1.3 39.2,56.65 38.5,57.34 38.5,59.35 38.78,59.62 45.01,59.62 45.5,59.14 46.95,59.14 U1.8 47.09,59 47.09,57.82 U1.7 47.23,57.76 56.37,48.61 58.93,48.61 | v58.93,40.79 58.93,40.3 | v58.93,48.48 58.93,48.61 | v132.96,41.97 134.14,40.79 134.14,35.04 134.21,34.9
  Top 0.3: v93.76,59.62 93.63,59.76 93.49,59.83
  Bottom 0.3: v68.14,108.58 59.35,108.58 56.23,105.47 v56.16,105.33 v52.91,108.58 52.77,108.52 v28.6,108.52 | v27.91,51.38 v21.47,44.94 | v58.93,48.48 v58.93,40.79 | v132.96,41.97 111.42,41.97 v93.76,59.62
32KHZ
  Top 0.15: 79.64,51.18 79.64,50.97 80.61,50 U3.1 | 79.64,51.18 79.64,60.94 84.62,65.93 87.39,65.93 88.02,65.3 88.02,65.16 92.66,60.52 92.66,60.32 R2-PINH1.1 | 79.64,51.18 78.39,51.18 69.53,60.04 38.64,60.04 38.09,59.49 38.09,56.85 37.74,56.51 26.73,56.51 17.66,47.44 17.66,47.16 U2.9
DN  (via drill 0.3)
  Top 0.15: 163.64,53.88 163.64,54.36 163.84,54.57 164.4,54.57 J2.A7 | 163.64,53.88 163.64,53.81 163.78,53.67 164.4,53.67 J2.B7 | v159.41,49.86 151.17,49.86 D1.4 | v162.18,52.63 162.32,52.63 163.57,53.88 163.64,53.88
  Bottom 0.15: v162.18,52.63 v159.41,49.86
DP
  Top 0.15: 165.02,54.15 164.47,54.15 J2.A6 | 165.02,54.15 165.23,54.36 165.23,54.85 165.02,55.05 164.47,55.05 J2.B6 | D1.6 151.17,51.73 154.98,51.73 156.09,50.62 165.51,50.62 166.13,51.24 166.13,52.98 165.02,54.08 165.02,54.15
EPD_3V3  (via drill 0.3)
  Top 0.3: 84.03,29.88 86.08,31.92 86.08,32.96 L1.2 | 84.03,29.88 81.92,27.77 81.92,26.73 C7.1 81.78,26.94 v81.16,26.94 | v79.92,26.94 77.77,26.94 Q2.2 | J1.16 84.62,15.44 85.11,15.44 J1.15 85.18,15.58 85.18,17.24 90.16,22.23 EPD_C5.2 90.3,22.3 90.92,22.92 | 90.92,22.92 95.77,22.92 106.64,12.05 106.64,2.56 TP17.TP | 84.03,29.88 90.86,23.06 90.92,22.92
  Bottom 0.3: v81.16,26.94 v79.92,26.94
EPD_3V3_C  (via drill 0.3)
  Top 0.3: v76.94,26.66 76.87,26.66 76.24,27.29 R_CL1.1 | v76.94,29.15 77.49,29.15 77.7,28.95 Q2.1 | TP13.TP 13.99,77.42 20.08,71.33 20.08,64.68 U2.18 20.22,64.54 20.22,64.19 v21.47,62.95
  Bottom 0.3: v76.94,26.66 v76.94,29.15 76.8,29.22 55.19,29.22 v21.47,62.95
EPD_BUSY  (via drill 0.3)
  Top 0.15: v88.16,16.2 88.16,15.44 J1.9 | v109.48,3.53 110.45,2.56 TP9.TP | v16.76,58.24 16.14,58.24 10.04,64.33 10.04,64.61 U2.26
  Bottom 0.15: v109.48,3.53 96.81,16.2 v88.16,16.2 88.09,16.2 87.32,15.44 68.42,15.44 21.68,62.19 21.19,62.19 17.24,58.24 v16.76,58.24
EPD_CS  (via drill 0.3)
  Top 0.15: v86.22,16.2 86.56,15.86 86.56,15.44 J1.12 | v76.45,24.58 75.69,25.35 D6.2 75.62,25.41 75,26.04 75,27.29 R9.1 74.86,27.29 37.12,27.29 22.02,42.38 21.95,42.38 | 21.95,42.38 21.95,45.08 20.15,46.88 20.15,47.09 U2.11 | 21.95,42.38 19.74,40.16 12.88,40.16 6.37,46.67 6.37,77.42 TP10.TP
  Bottom 0.15: v86.22,16.2 83.72,16.2 83.24,15.72 79.22,15.72 76.45,18.49 v76.45,24.58
EPD_DC  (via drill 0.3)
  Top 0.15: v86.98,14.61 87.05,14.68 87.05,15.37 J1.11 | v13.37,44.32 12.53,45.15 12.53,47.09 U2.5 12.46,47.16 12.46,48.13 8.59,52.01 v8.59,52.22 | v2.56,65.16 2.56,77.42 TP11.TP
  Bottom 0.15: v86.98,14.61 87.12,14.61 87.46,14.96 87.74,14.96 88.09,14.61 88.09,14.34 87.6,13.85 43.84,13.85 v13.37,44.32 | v2.56,65.16 2.56,58.24 v8.59,52.22
EPD_RST  (via drill 0.3)
  Top 0.15: v87.6,14.47 87.6,15.37 J1.10 | v21.33,61.7 18.97,61.7 16.34,64.33 16.34,64.61 U2.21 16.27,64.68 16.27,64.96 v15.44,65.79 | v10.18,71.05 10.18,77.42 TP12.TP
  Bottom 0.15: v87.6,14.47 87.46,14.47 87.12,14.13 86.84,14.13 86.28,14.68 86.28,14.75 85.87,15.17 67.86,15.17 v21.33,61.7 | v15.44,65.79 v10.18,71.05
FLASH_CS
  Top 0.15: U1.1 39.33,59 39.33,58.72 40.65,57.41 40.65,56.37 40.58,56.3 40.58,55.47 40.65,55.4 40.65,54.08 38.16,51.59 D9.2 38.09,51.52 36.77,50.21 35.59,50.21 R5.1 35.52,50.14 24.17,50.14 21.47,47.44 21.47,47.16 U2.12
GDR
  Top 0.15: J1.2 91.55,15.37 91.55,14.96 90.3,13.71 81.44,13.71 79.08,16.07 79.08,17.52 78.74,17.87 69.32,17.87 69.25,17.8 R4.2 69.18,17.8 68.21,18.77 63.85,18.77 63.09,18 62.88,18 Q3.1
GND  (via drill 0.3)
  Top 0.15: 54.43,98.75 54.43,97.71 54.29,97.57 51.66,97.57 51.18,98.06 49.44,98.06 IC1.3 49.38,98.13 49.24,98.13 48.2,99.17 48.2,107.61 | 54.43,98.75 53.74,99.44 C_DELAY.2 | C6.2 45.77,108.58 46.26,108.58 47.23,107.61 BOOT_BUTTON.1 | 48.2,107.61 47.3,107.61 BOOT_BUTTON.1 | 48.2,107.61 50.76,107.61 BOOT_BUTTON.2 | C10.2 60.59,108.72 61.15,108.72 62.26,107.61 CHANGE_BUTTON.1 62.33,107.61 64.68,107.61 | 64.68,107.61 65.72,107.61 CHANGE_BUTTON.2 | v86.49,106.71 88.85,106.71 TP5.TP | v64.68,107.55 64.68,107.61 | v55.82,98.75 54.43,98.75 | 24.65,107.61 22.3,107.61 RESET_BUTTON.1 22.23,107.61 21.26,108.58 20.98,108.58 C5.2 20.91,108.58 13.92,108.58 8.21,102.87 | 24.65,107.61 25.69,107.61 RESET_BUTTON.2 | 3.43,97.89 2.29,96.74 2.29,95.5 J4.G4 | 3.43,97.89 6.3,100.76 6.3,100.97 C9.2 6.37,101.04 8.21,102.87 | 3.43,97.89 6.09,95.22 6.09,93.28 5.4,92.59 4.92,92.59 J4.P6 4.85,92.66 3.53,91.34 3.53,84.83 1.25,82.55 1.25,82.34 J4.G3 | U2.29_9 14.4,55.68 13.23,55.68 U2.29_6 13.09,55.61 11.98,55.61 U2.29_3 | U2.29_1 11.91,53.18 11.91,54.36 U2.29_2 11.91,54.43 11.91,55.61 U2.29_3 | U2.29_4 13.16,53.18 11.98,53.18 U2.29_1 | U2.29_5 13.16,54.36 13.16,53.25 U2.29_4 | U2.29_4 13.23,53.18 14.4,53.18 U2.29_7 14.4,53.25 14.4,54.36 U2.29_8 | v9.14,50.41 7.48,48.75 7.48,47.16 U2.1 | v11.22,52.49 11.84,53.12 U2.29_1 | U2.29_3 11.84,55.68 7.48,60.04 7.48,64.61 U2.28 7.48,64.68 7.89,65.09 7.89,76.94 15.44,84.48 15.44,85.25 J4.G1 15.51,85.32 15.51,86.36 16.34,87.19 16.34,90.09 15.51,90.92 J4.G2 15.44,91 14.61,91.83 14.61,94.8 14.96,95.15 14.96,98.68 14.75,98.89 13.64,98.89 12.95,98.2 12.74,98.2 D8.1 12.74,98.27 v11.98,99.03
  Top 0.15: v8.24,102.77 8.24,102.84 8.21,102.87 | v46.12,106.58 47.16,107.61 BOOT_BUTTON.1 | v24.65,107.55 24.65,107.61 | 92.48,49.2 92.86,49.58 95.08,49.58 96.47,50.97 C10_SUPERCAP.2 | 92.48,49.2 90.3,47.02 88.29,47.02 C8.2 88.22,46.95 88.09,46.95 83.58,42.45 82.96,42.45 | 92.48,49.2 90.86,50.83 90.86,51.66 84.48,58.03 84.48,59.21 U3.13 | v40.16,55.26 39.33,55.26 U1.4 | U1.9 43.14,57.13 42.17,56.16 v41.06,56.16 41.06,53.25 39.89,52.08 | 39.89,52.08 38.16,50.34 38.16,50.07 D9.1 | 39.89,52.08 49.51,42.45 D10.1 49.58,42.38 50.76,42.38 51.31,41.83 51.87,41.83 52.42,42.38 D12.1 52.49,42.45 54.57,42.45 D11.1 54.64,42.45 82.96,42.45 | C4_USB.2 152.21,45.36 152.21,46.67 C5_USB.2 152.28,46.67 162.39,46.67 164.95,49.24 J2.MP3 164.4,48.61 v165.23,47.78 | v167.03,49.24 168.9,49.24 J2.MP1 | J2.A1 164.4,51.04 164.4,51.24 J2.B12 164.33,51.24 163.43,51.24 | 163.43,51.24 155.88,51.24 155.05,52.08 155.05,53.32 155.67,53.95 156.16,53.95 R2-USB.2 156.23,54.02 160.45,54.02 163.78,57.34 164.4,57.34 J2.B1 164.4,57.48 164.4,57.69 J2.A12 164.47,57.76 164.95,58.24 164.95,59.42 J2.MP4 165.02,59.49 168.9,59.49 J2.MP2 | v163.43,51.18 163.43,51.24 | 149.44,49.44 149.3,49.31 147.92,49.31 147.09,50.14 146.12,50.14 R2-USB1.1 145.98,50.14 137.6,50.14 137.25,50.48 136.91,50.48 U4.6 136.84,50.55 135.87,50.55 U4.9 | 149.44,49.44 149.44,50.21 148.89,50.76 148.61,50.76 D1.2 | U4.9 135.87,50.76 135.87,50.62 135.31,50.07 134.97,50.07 U4.4 134.9,50 134.9,45.64 134.14,44.87 134.14,44.8 | U4.1 134.97,51.52 135.31,51.52 135.87,50.97 135.87,50.83 U4.9 | 130.4,44.8 127,41.41 127,41.27 R2_BAT.1 126.94,41.2 125.83,41.2 119.94,35.32 119.94,34.35 120.63,33.66 R1_PWRUSB.1
  Top 0.15: 130.4,44.8 130.4,46.4 129.84,46.95 129.64,46.95 MCP73831.2 129.57,47.02 129.29,47.02 128.35,47.96 | 134.14,44.8 135.87,43.07 135.87,36.22 C1_BAT2.2 | 130.4,44.8 134.14,44.8 | 128.35,47.96 127.28,49.03 122.09,49.03 121.33,48.27 120.08,48.27 C1_BAT.2 | 128.35,47.96 131.78,51.38 133.31,51.38 C2_BAT.2 | v149.58,49.38 149.51,49.44 149.44,49.44 | EPD_C5.1 90.16,20.91 88.64,19.39 88.64,15.44 J1.8 88.57,15.37 88.57,14.82 87.74,13.99 85.18,13.99 84.14,15.03 84.14,15.37 J1.17 84.14,15.44 84.14,20.01 84.45,20.32 | 81.85,22.85 81.85,24.24 83.17,25.55 83.17,26.66 C7.2 | 81.85,22.85 81.85,21.81 82.55,21.12 82.55,20.98 EPD_C8.1 | 84.45,20.32 85.04,20.91 EPD_C7.1 85.11,20.98 87.6,20.98 EPD_C6.1 87.6,21.05 88.29,21.74 88.29,22.71 88.16,22.85 81.85,22.85 | 78.6,12.95 72.71,12.95 67.93,17.73 R4.1 | 78.6,12.95 79.57,12.95 J1.MP2 | 93.07,20.57 93.07,12.95 J1.MP1 | 93.07,20.57 92.73,20.91 EPD_C2.1 92.66,20.91 92.31,20.91 v91.89,20.5 | EPD_C1.1 95.22,20.91 93.49,20.91 93.14,20.57 93.07,20.57 | SJ1.1 61.49,11.49 61.56,11.56 61.56,13.92 R2.1 61.63,13.99 61.63,19.32 64.13,21.81 65.37,21.81 | 65.37,21.81 66,21.19 66,20.98 EPD_C12.1 | 65.37,21.81 65.37,22.71 65.51,22.85 67.93,22.85 68.59,22.2 | 68.59,22.2 69.8,20.98 EPD_C11.1 69.87,20.98 77.42,20.98 EPD_C10.1 77.49,20.91 77.91,20.5 v78.39,20.5 | v79.15,20.98 79.98,20.98 EPD_C9.1 | 68.59,22.2 71.74,25.35 74.17,25.35 D6.1 | v78.6,17.38 78.6,12.95 | v84.35,20.36 84.42,20.36 84.45,20.32 | C2.2 156.78,13.37 155.6,13.37 C1.2 155.54,13.37 153.67,15.23 SENSOR2.5 | 154.12,16.52 153.74,16.9 153.53,16.9 SENSOR2.7 | 154.12,16.52 154.22,16.41 154.22,15.79 153.74,15.3 153.53,15.3 SENSOR2.5
  Top 0.15: 154.12,16.52 155.26,17.66 156.37,17.66 SENSOR2.1 156.44,17.73 156.5,17.8 165.23,17.8 J3.1 | 125.69,31.09 124.17,31.09 121.67,33.59 120.7,33.59 R1_PWRUSB.1 | 125.69,31.09 126.31,31.72 C1_BAT1.2 126.31,31.79 126.31,33.73 126.07,33.97 | 126.07,33.97 125.76,34.28 125.62,34.28 IC4.2 | R1_PWRUSB.1 120.63,33.59 119.46,32.41 98.89,32.41 98.33,32.96 96.05,32.96 D3.1 96.05,32.89 v91.89,28.74 | 125.69,31.09 125.69,15.3 | 125.69,15.3 125.69,2.56 TP4.TP | 126.07,33.97 127.91,35.8 132.06,35.8 C3_TANT.- | 125.69,15.3 153.46,15.3 SENSOR2.5 | v82.96,42.03 82.96,42.45
  Bottom 0.15: v86.49,106.71 65.51,106.71 v64.68,107.55 64.61,107.55 v55.82,98.75 | v9.14,50.41 v11.22,52.49 11.22,53.32 21.33,63.43 30.12,63.43 38.3,55.26 v40.16,55.26 v41.06,56.16 | v11.98,99.03 v8.24,102.77 | v46.12,106.58 27.7,106.58 26.73,107.55 v24.65,107.55 | v167.03,49.24 166.69,49.24 166.03,48.58 | v165.23,47.78 166.03,48.58 | 166.03,48.58 v163.43,51.18 161.35,51.18 159.55,49.38 v149.58,49.38 | 84.35,20.5 79.71,20.5 79.22,20.98 v79.15,20.98 78.88,20.98 v78.39,20.5 78.39,20.43 78.6,20.22 v78.6,17.38 | 84.35,20.5 v91.89,20.5 v91.89,28.74 91.89,28.81 82.96,37.74 v82.96,42.03 | v84.35,20.36 84.35,20.5
  pour Top: 170.1,0.08 170.1,67.23 92.69,67.23 92.67,67.25 92.65,67.27 92.63,67.29 92.63,111.68 0.08,111.68 0.08,0.08 77.39,0.08 77.39,10.18 77.41,10.2 77.43,10.22 77.45,10.24 95.27,10.24 95.29,10.22 95.31,10.2 95.33,10.18 95.33,0.08
  pour Bottom: 170.1,0.08 170.1,67.23 92.69,67.23 92.67,67.25 92.65,67.27 92.63,67.29 92.63,111.68 0.08,111.68 0.08,0.08 77.39,0.08 77.39,10.18 77.41,10.2 77.43,10.22 77.45,10.24 95.27,10.24 95.29,10.22 95.31,10.2 95.33,10.18 95.33,0.08
GPIO8
  Top 0.15: R1.1 19.04,41.27 19.04,41.41 18.35,42.1 18.35,46.6 18.84,47.09 U2.10
I2C_PW  (via drill 0.3)
  Top 0.15: R1_PINH.2 153.04,13.37 154.29,13.37 R2-PINH.2 154.36,13.3 155.54,12.12 C1.1 155.6,12.05 156.78,12.05 C2.1 156.85,12.12 157.54,12.81 157.54,16 156.64,16.9 156.44,16.9 SENSOR2.2 156.37,16.97 v155.19,16.97 | 152.77,17.24 152.77,16.55 153.18,16.14 153.46,16.14 SENSOR2.6 | 152.77,17.24 153.18,17.66 153.46,17.66 SENSOR2.8 | v79.15,51.66 69.87,60.94 25.69,60.94 23.89,62.74 23.06,62.74 21.47,64.33 21.47,64.61 U2.17 | v152.63,17.31 152.7,17.24 152.77,17.24
  Bottom 0.15: v79.15,51.66 80.4,51.66 114.75,17.31 v152.63,17.31 152.7,17.31 153.04,16.97 v155.19,16.97
INT_RTC  (via drill 0.3)
  Top 0.15: 85.04,62.19 84.48,62.19 82.68,60.39 82.68,56.99 | 85.04,62.19 85.66,62.19 R1_PINH1.1 | 82.68,56.99 82.68,50.48 83.17,50 U3.3 | v37.6,56.99 25.97,56.99 16.34,47.37 16.34,47.16 U2.8 | v82.61,56.99 82.68,56.99 | v85.04,70.08 85.04,106.64 TP15.TP | 85.04,62.19 v85.04,62.88
  Bottom 0.15: v82.61,56.99 v37.6,56.99 | v85.04,62.88 v85.04,70.08
IO/BOOT
  Top 0.15: R_BOOT.1 52.08,107.34 52.28,107.34 53.39,108.44 53.39,108.72 52.91,109.21 50.9,109.21 50.83,109.14 BOOT_BUTTON.3 47.3,109.14 BOOT_BUTTON.4 47.23,109.14 47.16,109.21 45.22,109.21 45.01,109 45.01,108.17 45.7,107.48 45.7,107.34 C6.1 45.7,107.27 23.96,85.52 23.96,64.68 U2.15
IO/CHANGE  (via drill 0.3)
  Top 0.15: R_CHANGE.1 67.31,107.34 67.52,107.34 68.63,108.44 68.63,108.72 68.14,109.21 65.86,109.21 65.79,109.14 CHANGE_BUTTON.3 65.72,109.14 62.33,109.14 CHANGE_BUTTON.4 62.05,109.35 60.11,109.35 59.9,109.14 59.9,108.31 | 59.9,108.31 60.52,107.68 60.52,107.48 C10.1 | v19.53,70.64 13.85,64.96 13.85,64.68 U2.23 | v59.55,108.03 59.83,108.31 59.9,108.31
  Bottom 0.15: v19.53,70.64 22.16,70.64 v59.55,108.03
MISO  (via drill 0.3)
  Top 0.15: v50.41,39.96 49.72,39.27 R8.1 | v51.66,43.14 52.42,43.9 D12.2 | v40.16,56.51 40.16,56.65 39.33,57.48 39.33,57.76 U1.2 | v9.56,63.5 8.73,64.33 8.73,64.61 U2.27 | v3.05,84.97 3.05,92.17 4.5,93.63 5.05,93.63 J4.P7 | v91.34,27.91 116.69,2.56 118.07,2.56 TP6.TP
  Bottom 0.15: v3.05,84.97 3.05,70.08 9.56,63.57 v9.56,63.5 20.98,63.5 21.19,63.71 30.26,63.71 37.46,56.51 v40.16,56.51 40.79,56.51 40.93,56.65 41.2,56.65 51.66,46.19 v51.66,43.14 50.41,41.9 v50.41,39.96 50.48,39.96 51.73,38.71 70.01,38.71 80.81,27.91 v91.34,27.91
MOSI  (via drill 0.3)
  Top 0.15: v13.64,45.29 15.03,46.67 15.03,47.09 U2.7 | v6.51,38.16 2.56,38.16 TP7.TP | v5.89,65.72 4.09,67.52 4.09,88.29 5.05,89.26 J4.P3 | U1.5 47.09,55.19 47.09,51.45 54.57,43.97 D11.2 54.57,43.9 v53.74,43.07 | v85.18,14.61 85.59,15.03 85.59,15.37 J1.14 | 52.49,38.64 52.49,39.06 R7.1 52.56,39.06 52.7,39.2 v53.32,39.2 | 52.49,38.64 v52.49,29.92 | 52.49,38.64 v27.15,38.64
  Bottom 0.15: v6.51,38.16 v13.64,45.29 | v5.89,65.72 5.89,55.54 9.07,52.35 9.07,50.97 8.66,50.55 8.66,50.28 v13.64,45.29 | v85.18,14.61 68,14.61 52.7,29.92 v52.49,29.92 | v53.74,43.07 53.74,39.61 v53.32,39.2 | v13.64,45.29 20.5,45.29 v27.15,38.64
N$1
  Top 0.15: R2-USB.1 156.23,52.7 160.45,52.7 163.84,56.09 164.4,56.09 J2.B5
N$2
  Top 0.15: 125.14,33.24 125.48,33.24 125.55,33.31 IC4.3 | 125.14,33.24 124.93,33.24 | 124.93,33.24 D2.1 | 125.14,33.24 125.14,31.79 C1_BAT1.1 | 124.93,33.24 124.93,34.69 125.41,35.18 125.55,35.18 IC4.1 125.62,35.25 133.79,43.42 134.28,43.42 Q1.2
N$3  (via drill 0.3)
  Top 0.15: v146.6,52.22 146.12,51.73 146.12,51.45 R2-USB1.2 | v163.43,53.12 164.4,53.12 J2.A5
  Bottom 0.15: v146.6,52.22 161.15,52.22 162.04,53.12 v163.43,53.12
N$4
  Top 0.15: 100.14,36.22 101.59,36.22 C4.1 | 100.14,36.22 99.58,36.77 D4.1 | D3.2 99.58,33.03 99.58,35.59 100.14,36.15 100.14,36.22
N$5
  Top 0.15: CHG_LED.C 122.5,48.2 122.5,47.02 R1_BAT.1
N$6
  Top 0.15: R1_BAT.2 123.89,46.95 128.39,46.95 129.29,46.05 129.57,46.05 MCP73831.1
N$7
  Top 0.15: R2_BAT.2 127,42.59 127,45.98 MCP73831.5
N$8
  Top 0.15: J1.24 80.61,15.44 80.61,16.41 76.66,20.36 67.93,20.36 66.06,22.23 EPD_C12.2
N$9
  Top 0.15: C_DELAY.1 53.67,98.2 53.67,98.4 52.22,99.86 52.22,100 IC1.5
N$10
  Top 0.15: D7.1 85.32,64.75 85.32,63.71 86.42,62.6 86.42,56.51 91.13,51.8 91.13,51.31 92.24,50.21 92.66,50.21 R_CAPACITOR.1
N$11
  Top 0.15: J1.20 82.61,15.44 82.61,19.88 83.24,20.5 83.24,21.61 82.61,22.23 EPD_C8.2
N$12
  Top 0.15: R1_PWRUSB.2 120.7,34.97 122.78,34.97 123.13,35.32 D2.2 123.2,35.39 131.23,43.42 132.34,43.42 Q1.1
N$14
  Top 0.15: J1.22 81.58,15.44 81.58,20.36 80.68,21.26 80.68,21.4 80.4,21.68 78.25,21.68 77.7,22.23 77.49,22.23 EPD_C10.2
N$15  (via drill 0.3)
  Top 0.15: v83.1,16.2 83.1,15.44 J1.19 | v84.28,21.88 84.48,21.88 84.83,22.23 85.04,22.23 EPD_C7.2
  Bottom 0.15: v83.1,16.2 79.15,16.2 77.91,17.45 77.91,20.64 79.15,21.88 v84.28,21.88
N$16
  Top 0.15: J1.18 83.65,15.44 83.65,20.64 84.69,21.68 87.05,21.68 87.6,22.23 EPD_C6.2
N$24
  Top 0.15: J1.4 90.65,15.44 90.65,19.88 92.03,21.26 92.03,21.4 92.31,21.68 94.67,21.68 95.22,22.23 EPD_C1.2
N$26
  Top 0.15: J1.5 90.16,15.44 90.16,19.8 91.76,21.4 91.76,21.54 92.45,22.23 92.66,22.23 EPD_C2.2
PREVGH  (via drill 0.3)
  Top 0.15: J1.21 82.06,15.44 82.06,20.29 80.95,21.4 80.95,21.54 80.26,22.23 80.05,22.23 EPD_C9.2 80.26,22.3 80.26,23.06 82.48,25.28 82.48,27.08 v83.79,28.39 | v83.79,35.25 85.52,36.98 85.52,38.09 D5.1
  Bottom 0.15: v83.79,28.39 v83.79,35.25
PREVGL
  Top 0.15: 76.8,21.68 70.43,21.68 69.87,22.23 EPD_C11.2 | 76.8,21.68 77.84,21.68 81.09,18.42 81.09,15.44 J1.23 | 76.8,21.68 76.8,23.2 83.31,29.71 83.31,37.12 84.9,38.71 86.28,38.71 88.16,36.84 95.98,36.84 D4.2
RESE
  Top 0.15: J1.3 91.13,15.44 91.13,15.79 91.41,16.07 92.31,16.07 92.52,15.86 92.52,14.96 89.82,12.26 65.86,12.26 64.82,13.3 R3.2 64.75,13.37 64.19,13.92 64.19,17.94 Q3.2
RESE'
  Top 0.15: R3.1 64.75,12.05 63.57,12.05 63.02,11.49 SJ1.2 63.57,12.12 62.95,12.74 62.95,13.92 R2.2
RESET  (via drill 0.3)
  Top 0.15: 24.03,109.14 25.69,109.14 RESET_BUTTON.3 | 24.03,109.14 22.3,109.14 RESET_BUTTON.4 | 26.7,106.96 27.01,107.27 R_RESET.1 | 26.7,106.96 26.59,106.85 21.4,106.85 20.98,107.27 C5.1 | v48.68,100.76 49.38,100.07 IC1.1 | 26.7,106.96 v27.08,106.58 | v9.97,48.34 9.97,47.16 U2.3 | v24.03,108.1 24.03,109.14
  Bottom 0.15: v48.68,100.76 32.89,100.76 v27.08,106.58 24.03,106.58 | v9.97,48.34 9.97,48.54 2.08,56.44 2.08,84.62 24.03,106.58 | 24.03,106.58 v24.03,108.1
RTC_RST  (via drill 0.3)
  Top 0.15: v79.15,52.28 70.22,61.22 25.83,61.22 22.71,64.33 22.71,64.61 U2.16 | v83.38,51.38 84.42,50.34 84.42,50 U3.4
  Bottom 0.15: v79.15,52.28 82.48,52.28 v83.38,51.38
RX  (via drill 0.3)
  Top 0.15: v37.6,59.49 17.38,59.49 12.53,64.33 12.53,64.61 U2.24 | v122.16,3.53 123.13,2.56 TP2.TP
  Bottom 0.15: v37.6,59.49 80.75,59.49 83.1,57.13 83.1,56.85 78.67,52.42 78.67,47.02 v122.16,3.53
SCK  (via drill 0.3)
  Top 0.15: v13.02,45.29 13.78,46.05 13.78,47.09 U2.6 13.85,47.16 13.85,47.44 23.89,57.48 v37.26,57.48 | TP8.TP 2.56,41.97 v5.89,45.29 5.89,45.36 6.09,45.57 6.09,64.89 3.81,67.17 3.81,90.72 4.57,91.48 5.05,91.48 J4.P5 | v85.8,14.61 86.08,14.89 86.08,15.37 J1.13 | v54.22,27.77 54.22,38.71 54.57,39.06 R6.1 54.29,38.85 v53.25,39.89 | v51.45,42.31 49.86,43.9 49.58,43.9 D10.2 49.51,43.97 46.4,47.09 46.4,55.54 47.02,56.16 47.02,56.51 U1.6 46.95,56.51 v45.98,57.48
  Bottom 0.15: v5.89,45.29 v13.02,45.29 | v85.8,14.61 85.32,14.13 67.86,14.13 v54.22,27.77 | v51.45,42.31 51.45,41.69 v53.25,39.89 | v45.98,57.48 v37.26,57.48
SCL  (via drill 0.3)
  Top 0.15: v154.91,11.36 154.36,11.91 154.36,12.05 R2-PINH.1 | v155.74,14.68 156.37,15.3 SENSOR2.4 | v137.67,50.69 137.32,51.04 136.91,51.04 U4.7 | 163.6,22.47 165.23,20.84 J3.4 | 163.6,22.47 v136.56,49.51 | v163.57,22.44 163.6,22.47 | v37.95,59.97 25.83,59.97 23.61,62.19 19.8,62.19 17.66,64.33 17.66,64.61 U2.20 | v80.68,60.66 80.68,59.28 U3.16
  Bottom 0.15: v154.91,11.36 154.91,13.85 v155.74,14.68 155.81,14.68 v163.57,22.44 | v137.67,50.69 136.56,49.58 v136.56,49.51 136.49,49.58 126.66,49.58 116.13,60.11 81.3,60.11 80.75,60.66 v80.68,60.66 79.98,59.97 v37.95,59.97
SDA  (via drill 0.3)
  Top 0.15: v138.92,50.62 138.01,51.52 136.91,51.52 U4.8 136.84,51.59 v135.8,52.63 | v155.54,16.48 155.81,16.48 156.16,16.14 156.37,16.14 SENSOR2.3 | v152.35,12.67 152.42,12.67 152.97,12.12 R1_PINH.1 | v158.38,19.74 165.23,19.74 J3.3 | v69.73,60.45 25.76,60.45 23.75,62.46 20.77,62.46 18.91,64.33 18.91,64.61 U2.19 | v81.44,60.59 81.44,59.69 81.85,59.28 U3.15
  Bottom 0.15: v138.92,50.62 138.92,33.86 155.67,17.11 | 155.67,17.11 155.67,16.62 v155.54,16.48 155.54,16.41 152.35,13.23 v152.35,12.67 | v158.38,19.74 155.74,17.11 155.67,17.11 | v69.73,60.45 79.84,60.45 80.54,61.15 80.88,61.15 v81.44,60.59 116.06,60.59 124.03,52.63 v135.8,52.63
SRC  (via drill 0.3)
  Top 0.15: C4.2 101.59,37.53 87.88,37.53 86.42,38.99 82.96,38.99 82.13,38.16 D5.2 82.06,38.09 82.06,33.52 81.58,33.03 L1.1 81.51,32.96 v78.32,29.78 | v67.52,20.15 63.5,20.15 Q3.3
  Bottom 0.15: v67.52,20.15 71.05,20.15 78.32,27.42 v78.32,29.78
SS_SD
  Top 0.15: 12.19,97.44 9.97,99.65 8.93,99.65 R10.1 | 12.19,97.44 13.5,97.44 14.2,98.13 D8.2 | 12.19,97.44 12.19,95.01 5.54,88.36 5.54,88.22 J4.P2 5.54,88.16 7.62,86.08 7.62,77.01 6.79,76.17 6.79,53.39 11.22,48.96 11.22,47.16 U2.4
TX  (via drill 0.3)
  Top 0.15: v20.71,54.91 11.29,64.33 11.29,64.61 U2.25 | v60.66,19.25 60.66,10.53 60.8,10.39 100.34,10.39 105.47,5.26 105.47,2.01 106.16,1.32 113.08,1.32 114.26,2.49 TP1.TP
  Bottom 0.15: v20.71,54.91 25,54.91 v60.66,19.25
USB_D+  (via drill 0.3)
  Top 0.15: v147.57,51.73 148.54,51.73 D1.1 | v87.88,44.8 86.36,44.8 83.1,41.55 29.5,41.55 23.96,47.09 U2.14
  Bottom 0.15: v147.57,51.73 139.4,51.73 133.44,45.77 133.44,41.83 133.1,41.48 91.2,41.48 v87.88,44.8
USB_D-
  Top 0.15: D1.3 148.54,49.86 148.33,49.86 147.09,51.11 147.09,59 147.29,59.21 147.29,60.18 146.53,60.94 137.6,60.94 125.97,49.31 93,49.31 84.97,41.27 28.25,41.27 22.71,46.81 22.71,47.09 U2.13
VBAT
  Top 0.3: U4.2 134.9,51.04 U4.3 134.76,50.48 134.21,50.48 | 133.38,47.99 133.38,50.14 C2_BAT.1 133.51,50.21 133.79,50.48 134.21,50.48 | 133.38,47.99 133.38,45.57 Q1.3 | 133.38,47.99 129.64,47.99 MCP73831.3 | 134.21,50.48 134.21,51.8 142.03,59.62 146.05,59.62 TP3.TP
VBUS  (via drill 0.3)
  Top 0.3: 125.83,48.2 126.73,48.2 126.94,47.99 MCP73831.4 | 125.83,48.2 123.96,48.2 CHG_LED.A 123.82,48.2 123.2,47.58 123.2,46.4 123.06,46.26 120.7,46.26 118.76,48.2 C1_BAT.1 | 146.12,61.91 146.12,63.43 TP14.TP | 146.12,61.91 150.2,57.82 150.2,51.31 150.62,50.9 D1.5 151.1,50.76 150.69,50.76 150.2,50.28 150.2,47.51 150.83,46.88 C5_USB.1 150.9,46.67 150.9,45.36 C4_USB.1 150.97,45.22 152.07,44.11 152.07,41.97 PFMF.050.1.2 | v125.83,48.54 125.83,48.2 | v125.83,49.79 137.88,61.84 145.98,61.84 146.12,61.91
  Bottom 0.3: v125.83,49.79 v125.83,48.54
VRTC  (via drill 0.3)
  Top 0.15: C10_SUPERCAP.1 96.47,53.12 94.8,51.45 92.73,51.45 R_CAPACITOR.2 92.66,51.45 v91.62,51.45 | 84.97,51.45 84.97,57.13 83.24,58.86 83.24,59.21 U3.14 | 84.97,51.45 84.97,49.03 86.98,47.02 C8.1 | v85.04,51.45 84.97,51.45
  Bottom 0.15: v85.04,51.45 v91.62,51.45
VUSB
  Top 0.3: J2.A4 164.4,51.87 164.4,52.08 J2.B9 164.26,52.01 155.67,52.01 155.47,52.22 155.47,53.18 155.6,53.32 160.45,53.32 163.71,56.58 164.26,56.58 J2.B4 | J2.B4 164.4,56.65 164.4,56.85 J2.A9 | PFMF.050.1.1 147.64,41.9 149.16,41.9 151.24,39.82 158.1,39.82 166.48,48.2 166.48,51.04 166.55,51.11 166.55,53.88 165.65,54.78 165.65,56.02 165.09,56.58 164.54,56.58 J2.B4